# Altium PCB pt100_pcb.PcbDoc
Units mm, origin at the board's own origin, x right, y up, seen from the top; angles counter-clockwise.
Board outline 152.4 x 101.6 mm, 2 copper layers (Top Layer, Bottom Layer); 20 components, 12 nets, 61 pads, 0 vias.
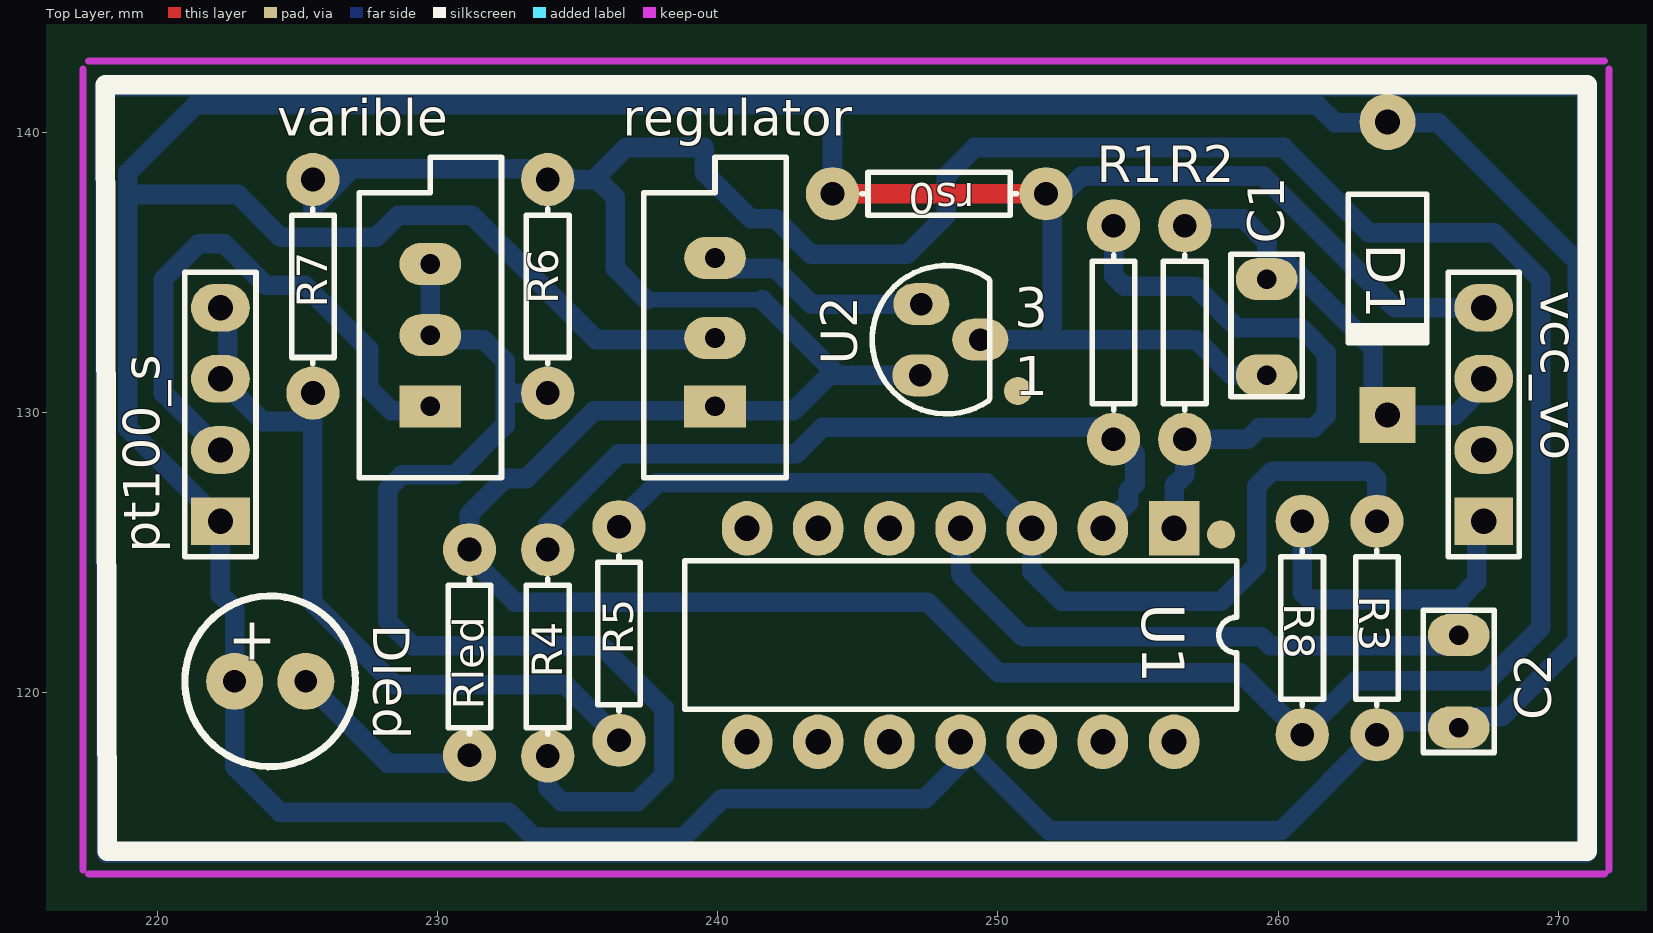
[diagram p0: Top Layer view]
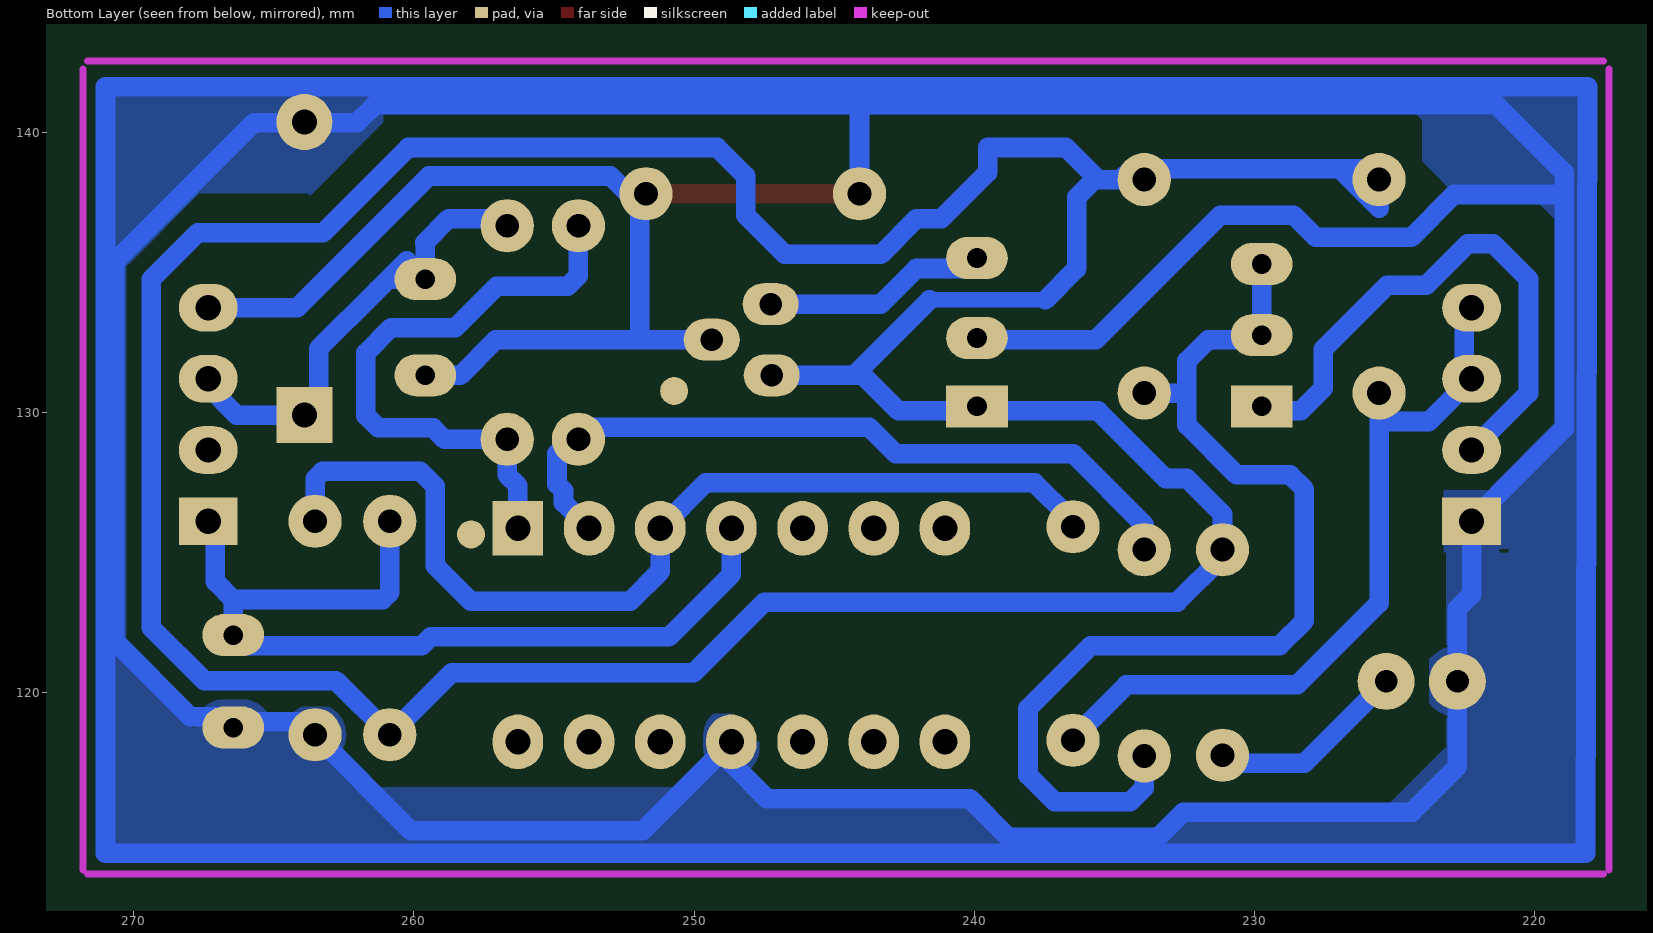
[diagram p1: Bottom Layer view, seen from below]

## Layer stack, top to bottom
Top Layer: signal copper 0.0356
Dielectric: dielectric 0.32, FR-4, Dk 4.8
Bottom Layer: signal copper 0.0356

## Board outline
200.66,79.375 353.06,79.375 353.06,180.975 200.66,180.975

## Design rules (kind name [scope] priority, off if disabled: settings)
Clearance [All] p1: gap=0.254
PlaneConnect [InNet('GND1')] p1: planeconnectstyle=Relief reliefexpansion=0 reliefentries=4 reliefconductorwidth=10 reliefairgap=1
PolygonConnect [InNet('GND1') vs InNet('GND1')] p1: connectstyle=Relief reliefconductorwidth=2 reliefentries=4 polygonreliefangle="90 Angle"
RoomDefinition pt100_shc [InComponentClass('pt100_shc')] p1: confinementstyle=ConfineIn formatcopy=TRUE lockcomponents=FALSE outline 354.203,78.359 359.156,78.359 359.156,90.551 354.203,90.551
RoutingLayers [All] p1: top layer_v5=FALSE bottom layer_v5=TRUE
RoutingVias [All] p1: holewidth=0.711 width=1.27 viastyle="Through Hole" minholewidth=0.711 minwidth=1.27 maxholewidth=0.711 maxwidth=1.27
SilkscreenOverComponentPads [All] p1: minsilkscreentomaskgap=0.254
SolderMaskExpansion [All] p1: expansion=0.102
Width [All] p1: maxlimit=1 minlimit=0.5 preferedwidth=0.7
25 further rules are at their usual default settings.

## Components (designator, comment, footprint, x,y, rotation, side; value= is the part's Value field where it differs from the comment)
C1 "103" RAD-0.1#1 259.588,133.096 r90 top
C2 "104" RAD-0.1#2 266.446,120.396 r90 top
D1 "Diode 1N4007" DIO10.46-5.3x2.8 263.906,135.128 r270 top
Dled "LED0" CE6 224.028,120.396 r0 top
pt100_s "Header 4" HDR1X4 222.25,126.111 r90 top
R1 "100k" AXIAL-0.3#1 254.127,132.842 r90 top
R2 "1k" AXIAL-0.3#1 256.667,132.842 r90 top
R3 "100k" AXIAL-0.3#1 263.525,122.301 r270 top
R4 "1k" AXIAL-0.3#2 233.934,121.285 r90 top
R5 "1k" AXIAL-0.3#1 236.474,122.105 r90 top
R6 "2k" AXIAL-0.3#1 233.934,134.493 r90 top
R7 "2k" AXIAL-0.3#1 225.552,134.493 r90 top
R8 "5.1k" AXIAL-0.3#1 260.858,122.301 r270 top
regulator "RPot" VR5#1 239.903,132.748 r90 top
Rled "330" AXIAL-0.3#3 231.14,121.285 r270 top
rs0 "0" AXIAL-0.3#1 247.904,137.795 r180 top
U1 "LM324AN" N014 248.666,122.047 r180 top
U2 "TL431CZ" TO92 248.158,132.588 r0 top
varible "RPot" VR5#2 229.743,132.748 r90 top
vcc_vo "Header 4" HDR1X4 267.335,126.111 r90 top

## Footprints (in the part's own frame and the unit in brackets; to place one, negate y for a bottom-side part, rotate by r counter-clockwise, add the part's x,y. Pads: shape width x height; smd on the part's side, far side on the other; paste and mask are expansions set on the pad)
AXIAL-0.3#1 [mm] "Axial Device, Thru-Hole; 2 Leads; 0.3 in Pin Spacing"
  round 1.9 hole 0.85: 1(-3.81,0) 2(3.81,0)
  silkscreen extent -2.77,-0.76 2.77,0.76
AXIAL-0.3#2 [mm] "Axial Device, Thru-Hole; 2 Leads; 0.3 in Pin Spacing"
  round 1.9 hole 0.85: 1(-3.55,0) 2(3.81,0)
  silkscreen extent -2.77,-0.76 2.77,0.76
AXIAL-0.3#3 [mm] "Axial Device, Thru-Hole; 2 Leads; 0.3 in Pin Spacing"
  round 1.9 hole 0.85: 1(-3.81,0) 2(3.53,0)
  silkscreen extent -2.77,-0.76 2.77,0.76
CE6 [mil]
  round 80 hole 32: 1(-50,0) 2(50,0)
  silkscreen extent -120,-120 120,120
DIO10.46-5.3x2.8 [mm] "Diode, Axial; Body 5.2 x 2.7 mm (LxDia. max), Lead Dia. 0.86 mm (max)"
  round 2 hole 0.9: 1(-5.23,0)
  rect 2x2 hole 0.9: 2(5.23,0)
  silkscreen extent -2.65,-1.41 2.75,1.4
HDR1X4 [mm] "Connector; Header; 4 Position"
  rect 1.7x2.1 hole 0.9: 1(0,0)
  oval 1.7x2.1 hole 0.9: 2(2.54,0) 3(5.08,0) 4(7.62,0)
  silkscreen extent -1.27,-1.27 8.89,1.27
N014 [mm] "DIP; 14 Leads; Row Spacing 7.62 mm; Pitch 2.54 mm"
  rect 1.8x1.95 hole 0.9: 1(-7.62,-3.81)
  oval 1.8x1.95 hole 0.9: 2(-5.08,-3.81) 3(-2.54,-3.81) 4(0,-3.81) 5(2.54,-3.81) 6(5.08,-3.81) 7(7.62,-3.81) 8(7.62,3.81) 9(5.08,3.81) 10(2.54,3.81) 11(0,3.81) 12(-2.54,3.81) 13(-5.08,3.81) 14(-7.62,3.81)
  silkscreen extent -9.85,-2.65 9.85,2.65
RAD-0.1#1 [mm] "Radial Cap, Thru-Hole; 2 Leads; 0.1 in Pin Spacing"
  oval 1.5x2.2 hole 0.7: 1(-1.778,0) 2(1.651,0)
  silkscreen extent -2.54,-1.27 2.54,1.27
RAD-0.1#2 [mm] "Radial Cap, Thru-Hole; 2 Leads; 0.1 in Pin Spacing"
  oval 1.5x2.2 hole 0.7: 1(-1.651,0) 2(1.651,0)
  silkscreen extent -2.54,-1.27 2.54,1.27
TO92 [mm] "TO, Flat Index; 3 In-Line, Axial Leads; Body Dia. 4.8mm; Leads 0.51 x 0.51 mm (max)"
  oval 2x1.5 hole 0.8: 1(-0.93,-1.27) 2(1.21,0) 3(-0.89,1.27)
  silkscreen extent -2.65,-2.65 1.55,2.65
VR5#1 [mm] "Variable Resistor, Thru-Hole; 3 Leads"
  rect 1.5x2.2 hole 0.7: 1(-2.54,0)
  oval 1.5x2.2 hole 0.7: 2(-0.1,0) 3(2.754,0)
  silkscreen extent -5.08,-2.54 6.35,2.54
VR5#2 [mm] "Variable Resistor, Thru-Hole; 3 Leads"
  rect 1.5x2.2 hole 0.7: 1(-2.54,0)
  oval 1.5x2.2 hole 0.7: 2(0,0) 3(2.54,0)
  silkscreen extent -5.08,-2.54 6.35,2.54

## Part data
C1 C2: library part Cap, "Capacitor"
D1: "1 Amp General Purpose Rectifier"
Dled: "Typical INFRARED GaAs LED"
pt100_s vcc_vo: "Header, 4-Pin"
R1 R2 R3 R4 R5 R6 R7 R8 Rled rs0: library part Res1, "Resistor"
regulator varible: "Potentiometer"
U1: "Quadruple Operational Amplifier"
U2: "Programmable Voltage Reference"

## Free pads (board coordinates)
  round 1 all layers, no hole: 1(250.71,130.76) 1(257.96,125.64)

## Nets (pads, with @x,y where several pads share a name; then routed paths per layer and width w, separated by ;. In a path a pad name is that pad's centre, name@x,y a point inside that pad or via, vN(x,y) a via of type N, cw(c..) or ccw(c..) an arc to the next point about the centre after c; other vN are vias at no path point)
GND1: C1.1 C2.1 D1.1 Dled.1 pt100_s.1 R3.2 regulator.2 rs0.1 rs0.2 U1.11 U2.2 vcc_vo.4 | length 374.6
  Top Layer w0.7: rs0.2 rs0.1
  Bottom Layer w0.7: regulator.2 239.903,132.588 235.662,132.588 231.217,137.033 228.6,137.033 227.807,136.24 224.4,136.24 222.87,137.77 218.948,137.77 ; rs0.2 244.094,140.843 244.221,140.97 ; U2.2 252.095,132.588 ; C1.1 258.343,131.318 257.073,132.588 252.095,132.588 ; C2.1@266.036,118.96 263.525,118.96 R3.2 260.096,115.062 251.841,115.062 U1.11 248.666,117.475 247.396,116.205 240.157,116.205 238.773,114.821 233.449,114.821 232.54,115.73 224.376,115.73 222.758,117.348 Dled.1 222.758,122.987 222.25,123.495 pt100_s.1 218.948,129.413 218.948,137.77 ; C2.1@266.446,119.126 267.97,119.126 270.67,121.826 270.67,135.372 265.707,140.335 263.906,140.335 262.024,140.335 261.389,140.97 244.221,140.97 ; vcc_vo.4 264.16,133.731 259.461,138.43 252.984,138.43 251.943,137.389 251.943,132.74 252.095,132.588 ; 218.948,137.77 218.948,138.557 221.361,140.97 244.221,140.97 ; 218.114,141.62 218.187,114.267 271.003,114.267 271.003,141.62 218.114,141.62
NetC1_2: C1.2 D1.2 R2.2 vcc_vo.3 | length 18.1
  Bottom Layer w0.7: R2.2 256.921,136.906 258.758,136.906 259.618,136.047 259.588,136.017 C1.2 260.917,134.747 ; C1.2@260.253,135.412 261.298,134.366 263.398,132.266 263.398,129.898 D1.2@263.652,130.152 ; D1.2@263.906,130.406 D1.2 266.321,129.898 267.335,130.912 vcc_vo.3 vcc_vo.3@267.081,131.191
NetDled_2: Dled.2 Rled.2 | length 7.3
  Bottom Layer w0.7: Dled.2 228.219,117.475 231.14,117.475 Rled.2
Netpt100_s_2: pt100_s.2 varible.1 | length 20.4
  Bottom Layer w0.7: pt100_s.2 220.218,130.683 220.218,134.747 221.488,136.017 222.383,136.017 223.876,134.525 225.265,134.525 227.54,132.25 227.54,130.86 228.352,130.048 229.362,130.048 229.362,130.2 229.735,130.2 varible.1
Netpt100_s_3: pt100_s.3 pt100_s.4 R5.1 R7.1 | length 27.2
  Bottom Layer w0.7: pt100_s.4 222.518,133.463 222.518,131.459 pt100_s.3 223.774,129.667 225.552,129.667 ; R7.1 225.552,129.667 ; R5.1 236.474,118.364 234.569,120.269 228.473,120.269 225.552,123.19 225.552,129.667
NetR1_1: R1.1 R4.2 U1.2 | length 26.4
  Bottom Layer w0.7: R4.2@233.934,125.984 236.474,128.524 242.804,128.524 243.75,129.47 253.943,129.47 254.891,128.522 254.891,127.431 254.66,127.2 254.66,126.771 U1.2 ; R1.1@254.127,128.524 R1.1
NetR1_2: R1.2 R2.1 U1.1 | length 22
  Bottom Layer w0.7: R1.2@254.127,136.906 R1.2 254.127,134.874 254.508,134.493 257.048,134.493 258.521,133.02 260.807,133.02 261.71,132.117 261.71,129.884 261.266,129.44 259.31,129.44 258.902,129.032 R2.1 ; U1.1 256.286,127.381 256.667,127.762 R2.1 ; R2.1@256.667,129.286 R2.1
NetR3_1: R3.1 R5.2 U1.3 | length 35.9
  Bottom Layer w0.7: R5.2 236.601,125.788 236.601,126.238 237.843,127.48 249.583,127.48 U1.3 251.206,124.324 252.28,123.25 257.96,123.25 259.24,124.53 259.24,127.36 259.769,127.889 263.261,127.889 263.525,127.625 R3.1
NetR4_1: R4.1 R6.1 varible.2 varible.3 | length 38.7
  Bottom Layer w0.7: varible.3 229.743,135.128 varible.2 229.743,132.588 231.648,132.588 232.41,131.826 232.41,130.683 ; R4.1 233.934,117.475 233.934,116.596 234.43,116.1 237.13,116.1 238.08,117.05 238.08,119.425 235.839,121.666 229.108,121.666 228.219,122.555 228.219,127.254 228.727,127.762 230.632,127.762 232.41,129.54 232.41,130.683 ; R6.1 232.41,130.683
NetR6_2: R6.2 R7.2 R8.2 regulator.1 Rled.1 U2.1 | length 149.7
  Bottom Layer w0.55: 237.465,134.01 241.595,134.01
  Bottom Layer w0.7: R6.2@234.772,138.303 234.391,138.684 R6.2@233.68,138.684 ; 237.465,134.01 236.347,135.128 236.347,137.668 235.712,138.303 235.585,138.303 ; 241.595,134.01 244.287,131.318 243.967,131.318 242.697,130.048 235.585,130.048 233.172,127.635 232.41,127.635 231.14,126.365 Rled.1 231.14,124.841 232.761,123.22 247.493,123.22 250.012,120.701 258.648,120.701 R8.2 262.787,120.42 267.48,120.42 269.367,122.307 269.367,134.747 267.716,136.398 263.246,136.398 260.198,139.446 249.174,139.446 248.158,138.43 248.158,137.033 246.761,135.636 243.332,135.636 242.062,136.906 241.173,136.906 239.522,138.557 239.522,139.446 236.728,139.446 235.585,138.303 ; 244.347,131.318 U2.1@247.288,131.318 ; R6.2@233.68,138.684 226.949,138.684 225.552,137.287 R7.2 225.933,138.684 R6.2@233.68,138.684 ; R6.2@233.68,138.684 233.934,138.43 R6.2 235.585,138.303
Netregulator_3: regulator.3 U2.3 | length 8.6
  Bottom Layer w0.7: regulator.3 239.903,135.128 242.062,135.128 243.332,133.858 U2.3@247.65,133.858
VCC: C2.2 R8.1 U1.4 vcc_vo.1 | length 33.7
  Bottom Layer w0.7: U1.4 248.666,124.214 250.9,121.98 259.401,121.98 259.715,121.666 266.446,121.666 C2.2 266.446,123.317 ; R8.1 260.858,123.571 261.112,123.317 266.446,123.317 ; vcc_vo.1 267.081,126.111 267.081,123.952 266.446,123.317
pads on no net: U1.5 U1.6 U1.7 U1.8 U1.9 U1.10 U1.12 U1.13 U1.14 vcc_vo.2

## Polygon pours and split planes (outlines as drawn)
GND1 on Bottom Layer "GND1-all" (solid, pour order 1002): 238.81,114.99 233.3,114.99 233.21,115.08 232.56,115.73 232.54,115.73 225.49,115.73 223.12,118.1 223.15,118.13 223.15,125.62 223.15,125.75 219.24,129.66 219.24,136.44 219.24,136.85 220.16,137.77 222.87,137.77 222.87,137.8 223.75,138.68 224.02,138.95 224.02,140.28 224.02,140.42 224.57,140.97 261.15,140.97 261.15,142.19 261.2,142.24 217.551,142.24 217.551,141.354 217.427,141.23 217.427,137.6 217.427,113.867 239.01,113.867 239.01,114.584 238.773,114.821
GND1 on Bottom Layer "GND1-all" (solid, pour order 1001): 261.46,116.58 261.423,116.617 250.286,116.617 248.932,117.971 247.401,116.44 247.17,116.44 240.26,116.44 239.84,116.02 238.81,114.99 238.81,113.867 261.27,113.867 261.27,116.39 261.46,116.58
GND1 on Bottom Layer "GND1-all" (solid, pour order 1000): 261.09,142.47 261.09,140.97 261.09,140.34 263.7,137.73 263.78,137.81 267.31,137.81 267.66,137.81 270.11,135.36 270.26,135.21 270.26,121.92 270.26,121.15 268.02,118.91 267.855,118.745 266.446,118.745 263.779,118.745 263.525,118.491 260.07,115.036 260.07,113.867 260.083,113.88 271.653,113.88 271.653,142.007 271.42,142.24 271.19,142.47 261.09,142.47

## Keep-outs
Keep-Out Layer:
  lines w0.254: 217.351,113.665 217.351,142.24 ; 217.551,113.525 271.653,113.525 ; 217.551,142.53 271.653,142.53 ; 271.803,113.665 271.803,142.24

## Other copper
Bottom Layer:
  rectangle net GND1: 263.906,140.335 265.707,140.358

## Silkscreen, mask and mechanical layers (free items; w line width, h text height)
Top Overlay:
  lines w0.7: 218.137,141.685 271.025,141.685 271.025,114.332 218.209,114.332 218.137,141.685

## Text inside footprints (layer, text, board x,y; h text height)
Dled: Top Overlay "+" at 222.504,121.158 h1.52
U2: Top Overlay "1" at 250.579,130.609 h1.4; Top Overlay "3" at 250.579,133.055 h1.4